# Altium PCB stm32G431_foc.pcbdoc (part 1 of 2)
Units mil, origin at the board's own origin, x right, y up, seen from the top; angles counter-clockwise.
Board outline 3189.03 x 2357.25 mil, 2 copper layers (Top Layer, Bottom Layer); 90 components, 81 nets, 390 pads, 421 vias.
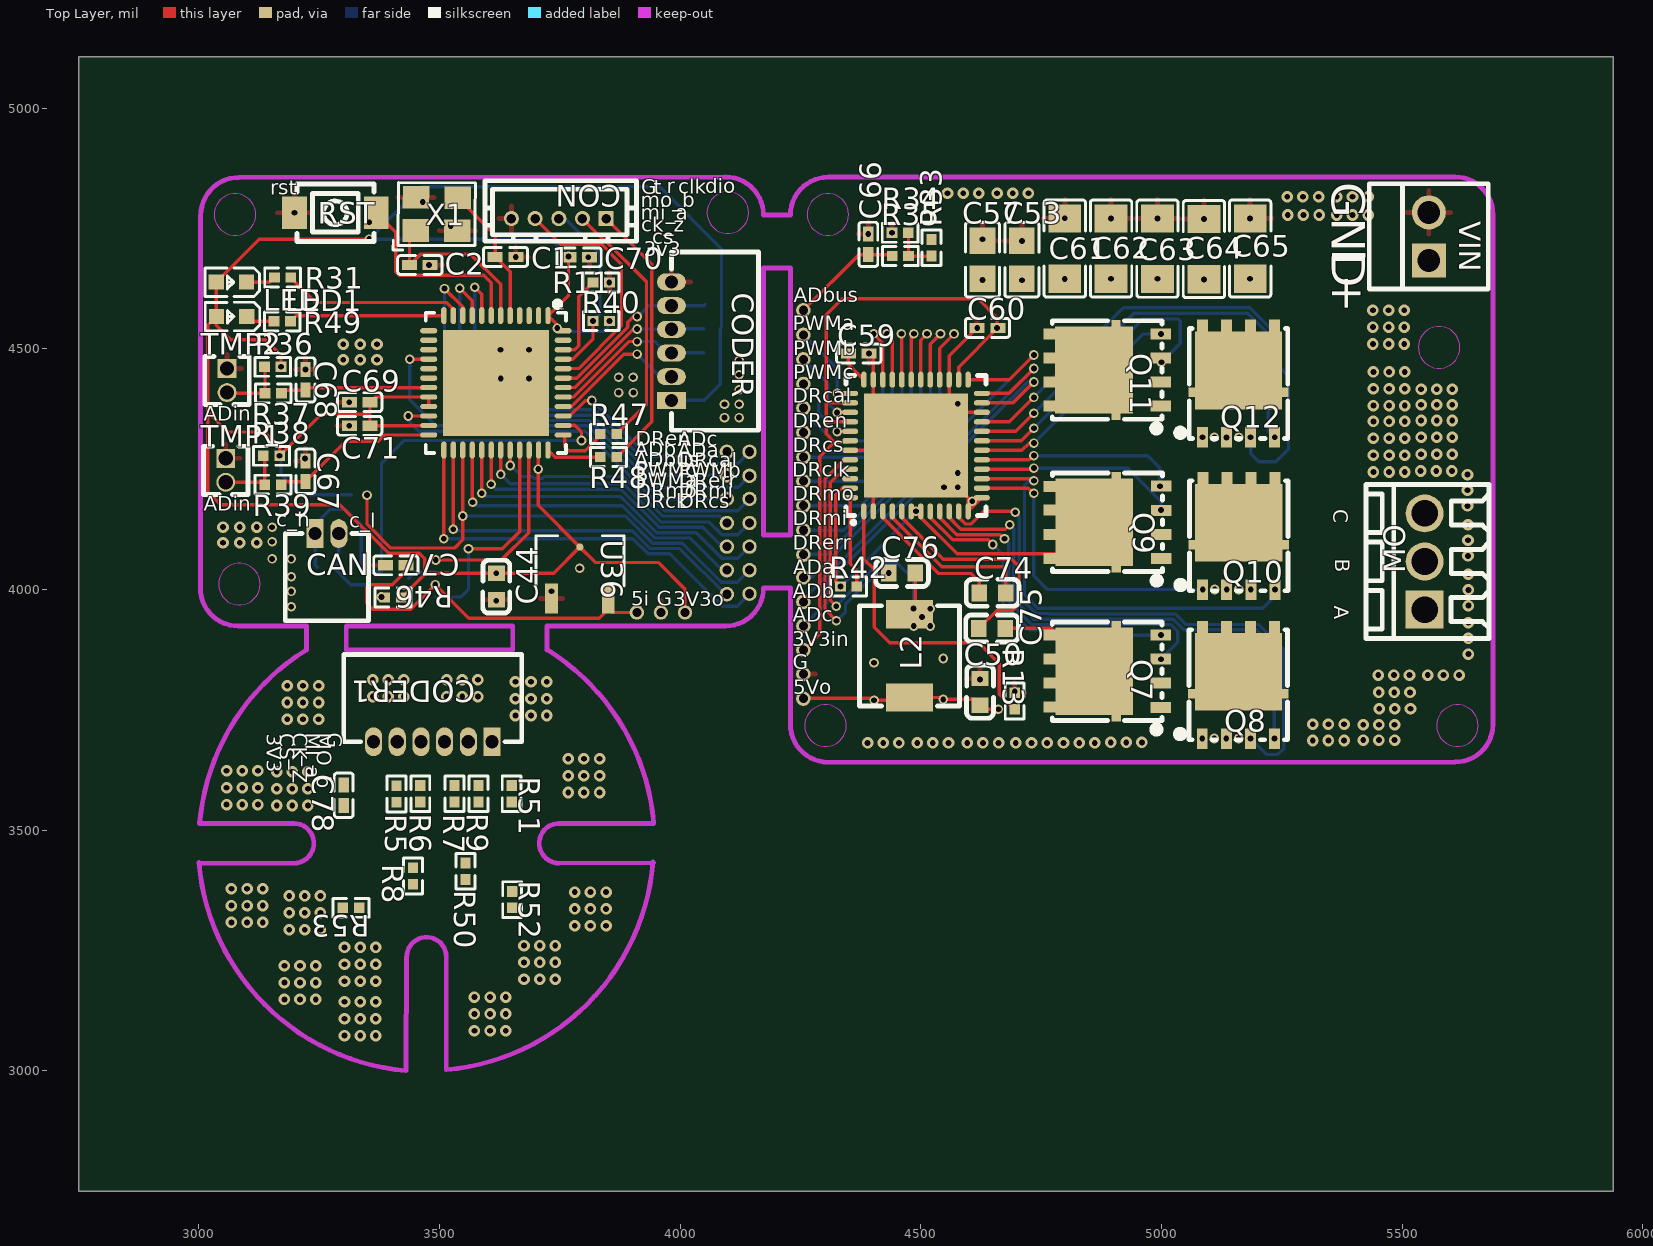
[diagram p0: Top Layer view]
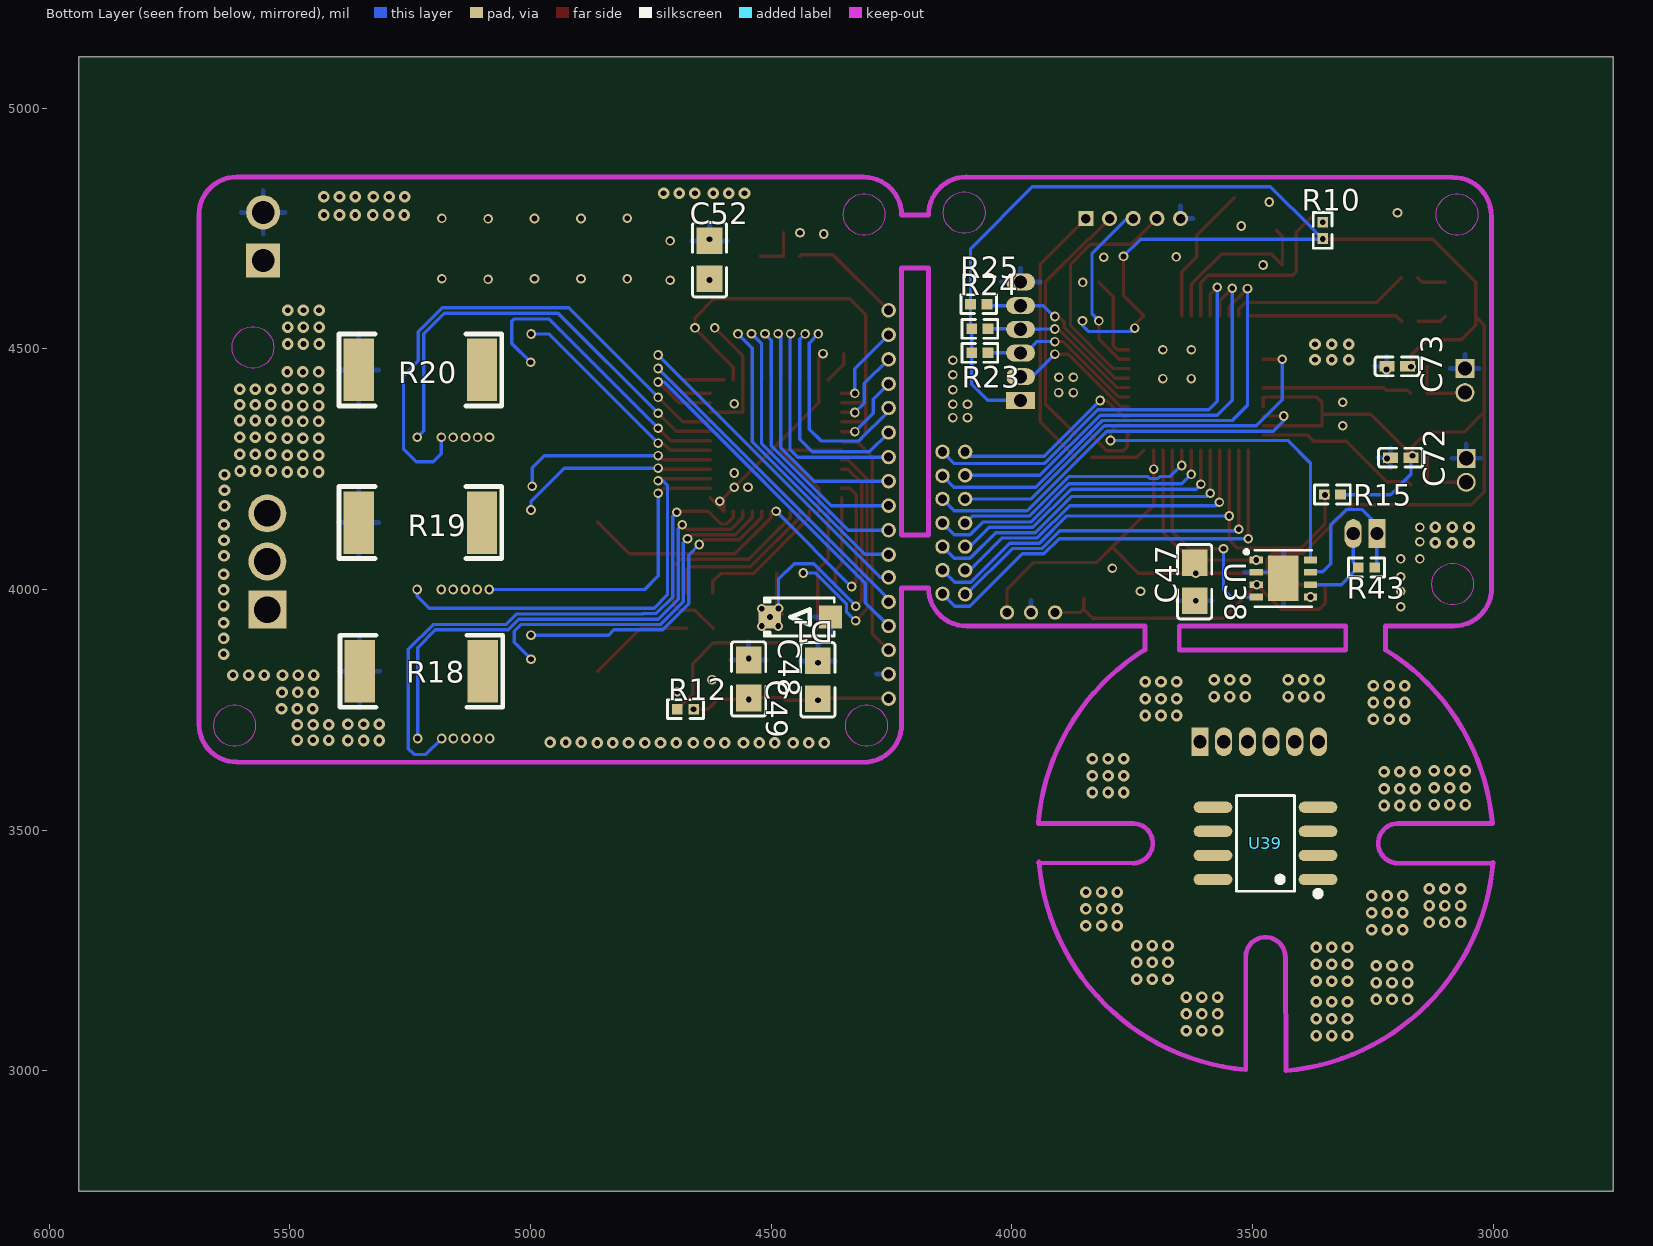
[diagram p1: Bottom Layer view, seen from below]

## Layer stack, top to bottom
Top Solder Mask Layer: solder mask 0.4, Solder Resist, Dk 3.5
Top Layer: signal copper 1.4
Dielectric1: dielectric 12.6, FR-4, Dk 4.8
Bottom Layer: signal copper 1.4
Bottom Solder Mask Layer: solder mask 0.4, Solder Resist, Dk 3.5

## Board outline
5939.03,2750 2750,2750 2750,5107.25 5939.03,5107.25

## Design rules (kind name [scope] priority, off if disabled: settings)
AssemblyTestPointUsage [All] p0: scope1count=1 scope1_0_kind=Board scope1_0_value=Board scope2count=1 scope2_0_kind=Board scope2_0_value=Board commentlength=0
AssemblyTestpoint [All] p0: scope1count=1 scope1_0_kind=Board scope1_0_value=Board scope2count=1 scope2_0_kind=Board scope2_0_value=Board commentlength=0
BoardOutlineClearance copperThickness1oz_1 [All] p0: scope1count=1 scope1_0_kind=Board scope1_0_value=Board scope2count=1 scope2_0_kind=Board scope2_0_value=Board commentlength=0 gap=10
BoardOutlineClearance copperThickness2oz_1 [All] p0: scope1count=1 scope1_0_kind=Board scope1_0_value=Board scope2count=1 scope2_0_kind=Board scope2_0_value=Board commentlength=0 gap=10
BoardOutlineClearance copperThickness1oz_1 [All] p1: gap=10 ignorepadtopadclearanceinfootprint=FALSE except(0: Arc-SplitContinuation Track-SplitContinuation SMDPad-SplitContinuation THPad-SplitContinuation Via-SplitContinuation Fill-SplitContinuation Poly-SplitContinuation Region-SplitContinuation Text-SplitContinuation; 6: Track-CutoutEdge SMDPad-CutoutEdge THPad-CutoutEdge Via-CutoutEdge Region-CutoutEdge; 11.8: Track-OutlineEdge SMDPad-OutlineEdge THPad-OutlineEdge Via-OutlineEdge Fill-OutlineEdge Fill-CutoutEdge Poly-OutlineEdge Region-OutlineEdge Text-OutlineEdge)
BoardOutlineClearance copperThickness2oz_1 [All] p2: gap=10 ignorepadtopadclearanceinfootprint=FALSE except(0: Arc-SplitContinuation Track-SplitContinuation SMDPad-SplitContinuation THPad-SplitContinuation Via-SplitContinuation Fill-SplitContinuation Poly-SplitContinuation Region-SplitContinuation Text-SplitContinuation; 6: Track-CutoutEdge SMDPad-CutoutEdge THPad-CutoutEdge Via-CutoutEdge Region-CutoutEdge; 11.8: Track-OutlineEdge SMDPad-OutlineEdge THPad-OutlineEdge Via-OutlineEdge Fill-OutlineEdge Fill-CutoutEdge Poly-OutlineEdge Region-OutlineEdge Text-OutlineEdge)
Clearance copperThickness1oz [All] p0 off: scope1count=1 scope1_0_kind=Board scope1_0_value=Board scope2count=1 scope2_0_kind=Board scope2_0_value=Board commentlength=1553 gap=6 // Protel DXP Scope 1 Expression Was: (InNet('GND') OR InNet('$1N9135') OR InNet('$1N9138') OR InNet('$1N1833') OR InNet('$1N1842') OR InNet('3V3') OR InNet('+5V') OR InNet('VM') OR InNet('$1N7928') OR InNet('VM_AD') OR InNet('TEMP1_AD') OR InNet('TEMP2_AD') OR InNet('$1N9649') OR InNet('$1N7809') OR InNet('$1N7874') OR InNet('SW') OR InNet('$1N9730') OR InNet('$1N32865') OR InNet('SPI1_CS') OR InNet('SPI1_SCLK_Z') OR InNet('SPI1_MISO_A') OR InNet('SPI1_MOSI_B') OR InNet('$1N22747') OR InNet('$1N21393') OR InNet('DBUG_RX') OR InNet('DBUG_TX') OR InNet('$1N7742') OR InNet('SHC') OR InNet('SHB') OR InNet('SHA') OR InNet('GHA') OR InNet('SPA') OR InNet('GLA') OR InNet('GHB') OR InNet('SPB') OR InNet('GLB') OR InNet('GHC') OR InNet('SPC') OR InNet('GLC') OR InNet('$1N2059') OR InNet('$1N2202') OR InNet('FB') OR InNet('DRV_MISO') OR InNet('$1N8829') OR InNet('$1N22797') OR InNet('$1N35691') OR InNet('$1N35795') OR InNet('$1N35883') OR InNet('SWCLK') OR InNet('SWDIO') OR InNet('SOC') OR InNet('SOB') OR InNet('SOA') OR InNet('DRV_CAL') OR InNet('DRV_CS') OR InNet('DRV_SCLK') OR InNet('DRV_MOSI') OR InNet('DRV_FAULT') OR InNet('INHA') OR InNet('INHB') OR InNet('INHC') OR InNet('CAN_RX') OR InNet('CAN_TX') OR InNet('CAN_STB') OR InNet('DRV_EN') OR InNet('LED_1') OR InNet('LED_2') OR InNet('$1N46251') OR InNet('$1N47947') OR InNet('VCC') OR InNet('$1N50187') OR InNet('$1N50186') OR InNet('$1N50185') OR InNet('$1N50184') OR InNet('CSQ') OR InNet('SCK') OR InNet('$1N50188') OR InNet('IFC') OR InNet('IFA') OR InNet('IFB') OR InNet('DATA'))
Clearance copperThickness2oz [All] p0: scope1count=1 scope1_0_kind=Board scope1_0_value=Board scope2count=1 scope2_0_kind=Board scope2_0_value=Board commentlength=0 gap=6
Clearance copperThickness1oz [(InNet('GND') OR InNet('$1N9135') OR InNet('$1N9138') OR InNet('$1N1833') OR InNet('$1N1842') OR InNet('3V3') OR InNet('+5V') OR InNet('VM') OR InNet('$1N7928') OR InNet('VM_AD') OR InNet('TEMP1_AD') OR InNet('TEMP2_AD') OR InNet('$1N9649') OR InNet('$1N7809') OR InNet('$1N7874') OR InNet('SW') OR InNet('$1N9730') OR InNet('$1N32865') OR InNet('SPI1_CS') OR InNet('SPI1_SCLK_Z') OR InNet('SPI1_MISO_A') OR InNet('SPI1_MOSI_B') OR InNet('$1N22747') OR InNet('$1N21393') OR InNet('DBUG_RX') OR InNet('DBUG_TX') OR InNet('$1N7742') OR InNet('SHC') OR InNet('SHB') OR InNet('SHA') OR InNet('GHA') OR InNet('SPA') OR InNet('GLA') OR InNet('GHB') OR InNet('SPB') OR InNet('GLB') OR InNet('GHC') OR InNet('SPC') OR InNet('GLC') OR InNet('$1N2059') OR InNet('$1N2202') OR InNet('FB') OR InNet('DRV_MISO') OR InNet('$1N8829') OR InNet('$1N22797') OR InNet('$1N35691') OR InNet('$1N35795') OR InNet('$1N35883') OR InNet('SWCLK') OR InNet('SWDIO') OR InNet('SOC') OR InNet('SOB') OR InNet('SOA') OR InNet('DRV_CAL') OR InNet('DRV_CS') OR InNet('DRV_SCLK') OR InNet('DRV_MOSI') OR InNet('DRV_FAULT') OR InNet('INHA') OR InNet('INHB') OR InNet('INHC') OR InNet('CAN_RX') OR InNet('CAN_TX') OR InNet('CAN_STB') OR InNet('DRV_EN') OR InNet('LED_1') OR InNet('LED_2') OR InNet('$1N46251') OR InNet('$1N47947') OR InNet('VCC') OR InNet('$1N50187') OR InNet('$1N50186') OR InNet('$1N50185') OR InNet('$1N50184') OR InNet('CSQ') OR InNet('SCK') OR InNet('$1N50188') OR InNet('IFC') OR InNet('IFA') OR InNet('IFB') OR InNet('DATA'))] p1: gap=6 ignorepadtopadclearanceinfootprint=FALSE except(4: Track-Track; 6.9: Track-Hole SMDPad-Hole THPad-Hole Via-Hole Fill-Hole Poly-Hole Region-Hole Text-Hole; 7: Arc-Arc Arc-Track Arc-SMDPad Arc-THPad Arc-Via Arc-Fill Arc-Poly Arc-Region Arc-Text Arc-Hole; 11.8: Track-Fill Fill-Region)
Clearance copperThickness2oz [All] p2: gap=6 ignorepadtopadclearanceinfootprint=FALSE except(6.9: Track-Hole SMDPad-Hole THPad-Hole Via-Hole Fill-Hole Poly-Hole Region-Hole Text-Hole; 7: Arc-Arc Arc-Track Arc-SMDPad Arc-THPad Arc-Via Arc-Fill Arc-Poly Arc-Region Arc-Text Arc-Hole; 8: Track-Track; 11.8: Track-Fill Fill-Region)
ComponentClearance [All] p0: scope1count=1 scope1_0_kind=Board scope1_0_value=Board scope2count=1 scope2_0_kind=Board scope2_0_value=Board commentlength=0 gap=10 collisioncheckmode=3
DiffPairsRouting differentialPair [All] p0: scope1count=1 scope1_0_kind=Board scope1_0_value=Board scope2count=1 scope2_0_kind=Board scope2_0_value=Board commentlength=0
DiffPairsRouting differentialPair [All] p1: maxlimit=6 minlimit=6 mostfreqgap=6 toplayer_minwidth=5 toplayer_maxwidth=100 toplayer_prefwidth=10 bottomlayer_minwidth=5 bottomlayer_maxwidth=100 bottomlayer_prefwidth=10 maxuncoupledlength=10
FabricationTestPointUsage [All] p0: scope1count=1 scope1_0_kind=Board scope1_0_value=Board scope2count=1 scope2_0_kind=Board scope2_0_value=Board commentlength=0 valid=0 allowmultiple=FALSE
FabricationTestpoint [All] p0: scope1count=1 scope1_0_kind=Board scope1_0_value=Board scope2count=1 scope2_0_kind=Board scope2_0_value=Board commentlength=0 side=3 testpointundercomponent=TRUE minsize=40 maxsize=100 preferedsize=60 minholesize=0 maxholesize=40 preferedholesize=32 testpointgrid=1
FanoutControl Fanout_BGA [All] p0 off: scope1count=1 scope1_0_kind=Board scope1_0_value=Board scope2count=1 scope2_0_kind=Board scope2_0_value=Board commentlength=69 // Protel DXP Scope 1 Expression Was: IsBGA   Fanout_BGA (Default Rule)
FanoutControl Fanout_LCC [All] p0 off: scope1count=1 scope1_0_kind=Board scope1_0_value=Board scope2count=1 scope2_0_kind=Board scope2_0_value=Board commentlength=69 // Protel DXP Scope 1 Expression Was: IsLCC   Fanout_LCC (Default Rule)
FanoutControl Fanout_SOIC [All] p0 off: scope1count=1 scope1_0_kind=Board scope1_0_value=Board scope2count=1 scope2_0_kind=Board scope2_0_value=Board commentlength=71 // Protel DXP Scope 1 Expression Was: IsSOIC   Fanout_SOIC (Default Rule)
FanoutControl Fanout_Small [All] p0 off: scope1count=1 scope1_0_kind=Board scope1_0_value=Board scope2count=1 scope2_0_kind=Board scope2_0_value=Board commentlength=84 // Protel DXP Scope 1 Expression Was: (CompPinCount < 5)   Fanout_Small (Default Rule)
FanoutControl Fanout_Default [All] p0: scope1count=1 scope1_0_kind=Board scope1_0_value=Board scope2count=1 scope2_0_kind=Board scope2_0_value=Board commentlength=30 // Fanout_Default (Default Rule)
Height [All] p0: scope1count=1 scope1_0_kind=Board scope1_0_value=Board scope2count=1 scope2_0_kind=Board scope2_0_value=Board commentlength=0
HoleSize [All] p0: scope1count=1 scope1_0_kind=Board scope1_0_value=Board scope2count=1 scope2_0_kind=Board scope2_0_value=Board commentlength=0 absolutevalues=TRUE maxlimit=100 minlimit=1 maxpercent=80.000 minpercent=20.000
HoleToHoleClearance [All] p0: scope1count=1 scope1_0_kind=Board scope1_0_value=Board scope2count=1 scope2_0_kind=Board scope2_0_value=Board commentlength=0
LayerPairs [All] p0: scope1count=1 scope1_0_kind=Board scope1_0_value=Board scope2count=1 scope2_0_kind=Board scope2_0_value=Board commentlength=0 enforce=TRUE
MinimumSolderMaskSliver [All] p0: scope1count=1 scope1_0_kind=Board scope1_0_value=Board scope2count=1 scope2_0_kind=Board scope2_0_value=Board commentlength=0
NetAntennae [All] p0: scope1count=1 scope1_0_kind=Board scope1_0_value=Board scope2count=1 scope2_0_kind=Board scope2_0_value=Board commentlength=0
PasteMaskExpansion pasteMaskExpansion [All] p0: scope1count=1 scope1_0_kind=Board scope1_0_value=Board scope2count=1 scope2_0_kind=Board scope2_0_value=Board commentlength=0 expansion=0
PasteMaskExpansion pasteMaskExpansion [All] p1: expansion=0
PlaneClearance [All] p0: scope1count=1 scope1_0_kind=Board scope1_0_value=Board scope2count=1 scope2_0_kind=Board scope2_0_value=Board commentlength=0 clearance=20
PlaneConnect innerPlane [All] p0: scope1count=1 scope1_0_kind=Board scope1_0_value=Board scope2count=1 scope2_0_kind=Board scope2_0_value=Board commentlength=0 planeconnectstyle=Relief reliefexpansion=20 reliefentries=4 reliefconductorwidth=10 reliefairgap=10
PlaneConnect innerPlane [All] p1: planeconnectstyle=Relief reliefexpansion=20 reliefentries=4 reliefconductorwidth=10 reliefairgap=10
PolygonConnect copperRegion [All] p0: scope1count=1 scope1_0_kind=Board scope1_0_value=Board scope2count=1 scope2_0_kind=Board scope2_0_value=Board commentlength=0 connectstyle=Relief reliefconductorwidth=10 reliefentries=4 polygonreliefangle="90 Angle"
PolygonConnect copperRegion [All] p1: connectstyle=Relief reliefconductorwidth=10 reliefentries=4 polygonreliefangle="90 Angle" airgapwidth=10
RoutingCorners [All] p0: scope1count=1 scope1_0_kind=Board scope1_0_value=Board scope2count=1 scope2_0_kind=Board scope2_0_value=Board commentlength=0 cornerstyle=45-Degree minsetback=100 maxsetback=100
RoutingLayers [All] p0: scope1count=1 scope1_0_kind=Board scope1_0_value=Board scope2count=1 scope2_0_kind=Board scope2_0_value=Board commentlength=0 top layer=Automatic bottom layer=Automatic
RoutingPriority [All] p0: scope1count=1 scope1_0_kind=Board scope1_0_value=Board scope2count=1 scope2_0_kind=Board scope2_0_value=Board commentlength=0
RoutingTopology [All] p0: scope1count=1 scope1_0_kind=Board scope1_0_value=Board scope2count=1 scope2_0_kind=Board scope2_0_value=Board commentlength=0 topology=Shortest
RoutingVias viaSize [All] p0: scope1count=1 scope1_0_kind=Board scope1_0_value=Board scope2count=1 scope2_0_kind=Board scope2_0_value=Board commentlength=0 holewidth=12.01 width=24.02 viastyle="Through Hole" minholewidth=11.81 minwidth=19.68 maxholewidth=248.03 maxwidth=393.7
RoutingVias viaSize [All] p1: holewidth=12.01 width=24.02 viastyle="Through Hole" minholewidth=11.81 minwidth=19.68 maxholewidth=248.03 maxwidth=393.7
ShortCircuit [All] p0: scope1count=1 scope1_0_kind=Board scope1_0_value=Board scope2count=1 scope2_0_kind=Board scope2_0_value=Board commentlength=0 allowed=FALSE
SilkToBoardRegionClearance [All] p0: scope1count=1 scope1_0_kind=Board scope1_0_value=Board scope2count=1 scope2_0_kind=Board scope2_0_value=Board commentlength=0
SilkToSilkClearance [All] p0: scope1count=1 scope1_0_kind=Board scope1_0_value=Board scope2count=1 scope2_0_kind=Board scope2_0_value=Board commentlength=0
SilkToSolderMaskClearance [All] p0 off: scope1count=1 scope1_0_kind=Board scope1_0_value=Board scope2count=1 scope2_0_kind=Board scope2_0_value=Board commentlength=44 // Protel DXP Scope 1 Expression Was: IsPad
SolderMaskExpansion solderMaskExpansion [All] p0: scope1count=1 scope1_0_kind=Board scope1_0_value=Board scope2count=1 scope2_0_kind=Board scope2_0_value=Board commentlength=0 expansion=2
SolderMaskExpansion solderMaskExpansion [All] p1: expansion=2 istentingtop=FALSE useseparateexpansions=TRUE expansionbottom=2 istentingbottom=FALSE
UnRoutedNet [All] p0: scope1count=1 scope1_0_kind=Board scope1_0_value=Board scope2count=1 scope2_0_kind=Board scope2_0_value=Board commentlength=0
UnpouredPolygon [All] p0: scope1count=1 scope1_0_kind=Board scope1_0_value=Board scope2count=1 scope2_0_kind=Board scope2_0_value=Board commentlength=0
Width copperThickness1oz_2 [All] p0: scope1count=1 scope1_0_kind=Board scope1_0_value=Board scope2count=1 scope2_0_kind=Board scope2_0_value=Board commentlength=0 maxlimit=100 minlimit=5 preferedwidth=10
Width copperThickness2oz_2 [All] p0: scope1count=1 scope1_0_kind=Board scope1_0_value=Board scope2count=1 scope2_0_kind=Board scope2_0_value=Board commentlength=0 maxlimit=100 minlimit=8 preferedwidth=10
Width copperThickness1oz_2 [All] p1: maxlimit=100 minlimit=5 preferedwidth=10
Width copperThickness2oz_2 [All] p2: maxlimit=100 minlimit=8 preferedwidth=10
27 further rules are at their usual default settings.

## Components (designator, comment, footprint, x,y, rotation, side; value= is the part's Value field where it differs from the comment)
C1 "CAP_0402" C0402 3636.97,4691.18 r180 top
C2 "CAP_0402" C0402 3458.97,4674.18 r180 top
C44 "0.1u" C0603 3617.97,4006.18 r90 top
C47 "CAP_0805" C0805 3619.97,4016.18 r90 bottom
C48 "CAP_0805" C0805 4402.9,3812.31 r270 bottom
C49 "CAP_0805" C0805 4546.81,3814.12 r270 bottom
C50 "0.1u" C0603 4622.97,3787.18 r270 top
C52 "CAP_0805" C0805 4628.1,4685.05 r270 bottom
C53 "CAP_0805" C0805 4710.1,4685.05 r270 top
C57 "CAP_0805" C0805 4628.1,4685.31 r270 top
C59 "CAP_0402" C0402 4370.97,4490.18 r0 top
C60 "CAP_0402" C0402 4638.51,4543.64 r0 top
C61 "CAP_1206" C1206 4799.26,4708.41 r270 top
C62 "CAP_1206" C1206 4895.26,4708.41 r270 top
C63 "CAP_1206" C1206 4991.75,4708.24 r270 top
C64 "CAP_1206" C1206 5088.26,4707.41 r270 top
C65 "CAP_1206" C1206 5184.26,4708.41 r270 top
C66 "CAP_0402" C0402 4390.97,4717.18 r270 top
C67 "CAP_0402" C0402 3221.15,4245.64 r270 top
C68 "CAP_0402" C0402 3221.51,4435.61 r270 top
C69 "CAP_0402" C0402 3333.97,4389.18 r0 top
C70 "CAP_0402" C0402 3789.97,4690.18 r180 top
C71 "CAP_0402" C0402 3333.97,4340.18 r0 top
C72 "CAP_0402" C0402 3191.93,4273.87 r180 bottom
C73 "CAP_0402" C0402 3199.22,4463.87 r180 bottom
C74 "CAP_0603" C0603 4648.97,3993.18 r180 top
C75 "CAP_0603" C0603 4647.97,3919.18 r180 top
C76 "CAP_0603" C0603 4460.97,4034.18 r0 top
C77 "CAP_0402" C0402 3409.19,4050.26 r0 top
C78 "CAP_0402" C0402 3300.86,3572.55 r90 top
CAN "BX-MX1.25-2PWZ" CONN-TH_2P-P1.25_BX-MX1.25-2PWZ 3265.97,4116.18 r0 top
CODER "BX-MX1.25-6PWZ" CONN-TH_6P-P1.25_BX-MX1.25-6PWZ 3981.78,4515.99 r90 top
CODER1 "BX-MX1.25-6PWZ" CONN-TH_6P-P1.25_BX-MX1.25-6PWZ 3485.86,3683.55 r180 top
CON "ZX-MX1.25-5PZZ" CONN-TH_5P-P1.25_L3.2-W8.0 3747.69,4770.82 r180 top
D1 "SS14_C2909920" SOD-123FL_L2.8-W1.8-LS3.7-RD 4439.7,3942.68 r180 bottom
L2 "15uH" IND-SMD_L5.4-W5.2_YXMAA0503 4476.48,3862.13 r270 top
LED "LED_0603-R" LED_0603 3065.45,4638.43 r180 top
LED1 "LED_0603-R" LED_0603 3065.79,4567.07 r180 top
MO "DB125-2.54-3P-GN-S" CONN-TH_DB125-2.54-3P-GN 5546.97,4058.18 r90 top
Q7 "LNN06R140" DFN-8_L4.9-W6.0-P1.27-LS6.1-BL 4887.4,3830.23 r90 top
Q8 "LNN06R140" DFN-8_L4.9-W6.0-P1.27-LS6.1-BL 5159.77,3801.87 r0 top
Q9 "LNN06R140" DFN-8_L4.9-W6.0-P1.27-LS6.1-BL 4888.04,4139.6 r90 top
Q10 "LNN06R140" DFN-8_L4.9-W6.0-P1.27-LS6.1-BL 5160.68,4111.52 r0 top
Q11 "LNN06R140" DFN-8_L4.9-W6.0-P1.27-LS6.1-BL 4887.27,4455.99 r90 top
Q12 "LNN06R140" DFN-8_L4.9-W6.0-P1.27-LS6.1-BL 5160.28,4427.75 r0 top
R5 "Res_0402" R0402 3410.39,3575.08 r270 top
R6 "Res_0402" R0402 3459.86,3575.55 r270 top
R7 "Res_0402" R0402 3530.86,3575.55 r270 top
R8 "Res_0402" R0402 3444.86,3404.55 r270 top
R9 "Res_0402" R0402 3580.86,3575.55 r270 top
R10 "Res_0402" R0402 3353.97,4746.18 r90 bottom
R11 "Res_0402" R0402 3835.97,4638.18 r0 top
R12 "Res_0402" R0402 4677.97,3751.18 r180 bottom
R13 "Res_0402" R0402 4694.97,3768.18 r270 top
R15 "Res_0402" R0402 3333.97,4197.18 r180 bottom
R18 "15m" R2512 5226.97,3830.18 r0 bottom
R19 "15m" R2512 5228.97,4139.18 r0 bottom
R20 "15m" R2512 5228.97,4456.18 r0 bottom
R23 "Res_0402" R0402 4066.31,4491.81 r180 bottom
R24 "Res_0402" R0402 4066.31,4541.81 r180 bottom
R25 "Res_0402" R0402 4068.69,4592.79 r180 bottom
R31 "1k" R0402 3173.97,4648.18 r180 top
R33 "Res_0402" R0402 4521.97,4710.18 r90 top
R34 "Res_0402" R0402 4457.07,4741.12 r0 top
R35 "Res_0402" R0402 4457.45,4692.86 r180 top
R36 "Res_0402" R0402 3153.43,4462.7 r0 top
R37 "Res_0402" R0402 3154.38,4407.76 r180 top
R38 "Res_0402" R0402 3150.82,4277.7 r0 top
R39 "Res_0402" R0402 3153.69,4217.76 r180 top
R40 "Res_0402" R0402 3835.97,4558.18 r180 top
R42 "Res_0402" R0402 4349.97,4006.18 r180 top
R43 "Res_0402" R0402 3262.83,4045.77 r180 bottom
R46 "Res_0402" R0402 3403.19,3983.26 r0 top
R47 "Res_0402" R0402 3850.97,4323.18 r0 top
R48 "Res_0402" R0402 3850.97,4275.18 r0 top
R49 "1k" R0402 3172.97,4557.18 r180 top
R50 "Res_0402" R0402 3553.86,3414.55 r270 top
R51 "Res_0402" R0402 3649.86,3575.55 r270 top
R52 "Res_0402" R0402 3650.86,3355.55 r270 top
R53 "Res_0402" R0402 3315.86,3338.55 r180 top
RST "KEY_3x4X2_SMT" KEY-SMD_L4.0-W3.0-LS4.9-1 3283.44,4782.81 r0 top
TMP1 "PZ127V-11-02-H25" HDR-TH_2P-P1.27-V-M 3055.67,4247.65 r270 top
TMP2 "PZ127V-11-02-H25" HDR-TH_2P-P1.27-V-M 3058.39,4434.18 r270 top
U1 "STM32G431CBU6U" UFQFPN-48_L7.0-W7.0-P0.50-BL-EP5.6 3617.14,4429.42 r180 top
U2 "DRV8323RSRGZT" VQFN-48_L7.0-W7.0-P0.50-BL-EP5.5 4489.97,4299.18 r0 top
U36 "AMS1117-5.0(XBLW)" SOT-89-3_L4.5-W2.5-P1.50-LS4.2-BR 3791.55,4034.95 r270 top
U38 "SIT1042TK/3" HVSON-8_L3.0-W3.0-P0.65-BL-EP 3435.74,4022.94 r270 bottom
U39 "TLE5012BE1000FUMA1" SOIC-8_L4.9-W3.9-P1.27-LS6.0-BL 3472.86,3472.55 r90 bottom
VIN "DB125-2.54-2P-GN-S" CONN-TH_DB125-2.54-2P-GN 5555.59,4733.57 r90 top
X1 "16MHz" OSC-SMD_4P-L3.2-W2.5-BL 3493.97,4780.18 r359.62 top

## Footprints (in the part's own frame and the unit in brackets; to place one, negate y for a bottom-side part, rotate by r counter-clockwise, add the part's x,y. Pads: shape width x height; smd on the part's side, far side on the other; paste and mask are expansions set on the pad)
C0402 [mm]
  rect 0.79x0.54 smd paste-100 mask+0: 1(-0.545,0) 2(0.545,0)
  silkscreen extent -1.17,-0.5 1.17,0.5
C0603 [mm]
  rect 0.8x0.9 smd: 1(-0.7,0) 2(0.7,0)
  silkscreen extent -1.41,-0.71 1.39,0.72
C0805 [mm]
  rect 1.41x1.35 smd paste-100 mask+0: 1(-1,0) 2(1,0)
  silkscreen extent -1.96,-0.9 1.96,0.9
C1206 [mm]
  rect 1.485x1.728 smd paste-100 mask+0: 1(-1.593,0) 2(1.593,0)
  silkscreen extent -2.56,-1.09 2.56,1.09
CONN-TH_2P-P1.25_BX-MX1.25-2PWZ [mil]
  rect 35.43x60 hole 27.56: 1(-24.6,0)
  oval 35.43x60 hole 27.56: 2(24.61,0)
  silkscreen extent -87,-181 87,0
CONN-TH_5P-P1.25_L3.2-W8.0 [mm]
  rect 0.8x0.8 hole 0.5: 1(-2.5,0)
  round 0.8 hole 0.5: 2(-1.25,0) 3(0,0)
  round 0.8 hole 0.5 copper offset 0,0: 4(1.25,0) 5(2.5,0)
  silkscreen extent -4.1,-2 3.9,1.2
CONN-TH_6P-P1.25_BX-MX1.25-6PWZ [mil]
  rect 35.43x60 hole 27.56: 1(-123.03,0)
  oval 35.43x60 hole 27.56: 2(-73.82,0) 3(-24.6,0) 4(24.61,0) 5(73.82,0) 6(123.03,0)
  silkscreen extent -185,-181 185,0
CONN-TH_DB125-2.54-2P-GN [mm]
  rect 1.8x1.8 hole 1.2: 1(-1.27,0)
  round 1.8 hole 1.2: 2(1.27,0)
  silkscreen extent -2.78,-3.14 2.78,3.14
CONN-TH_DB125-2.54-3P-GN [mm]
  rect 2x2 hole 1.4: 1(-2.54,0)
  round 2 hole 1.4: 2(0,0) 3(2.54,0)
  silkscreen extent -4.06,-3.4 4.06,3.1
DFN-8_L4.9-W6.0-P1.27-LS6.1-BL [mm]
  rect 0.58x1.079 smd paste-100 mask+0: 1(-1.905,-2.835) 2(-0.635,-2.835) 3(0.635,-2.835) 4(1.905,-2.835)
  rect 0.58x1.08 smd paste-100 mask+0: 5(1.9,2.835) 6(0.64,2.835) 7(-0.63,2.835) 8(-1.9,2.835)
  rect 0.95x0.5 smd paste-100 mask+0: 9(-2.169,-0.465) 9(2.169,-0.465)
  rect 4.6x4.1 smd paste-100 mask+0: 9(0,0.695)
  silkscreen extent -3.2,-2.89 2.6,2.9
HDR-TH_2P-P1.27-V-M [mm]
  rect 1x1 hole 0.75: 1(-0.635,0)
  round 1 hole 0.75: 2(0.635,0)
  silkscreen extent -1.27,-1.18 1.27,1.18
HVSON-8_L3.0-W3.0-P0.65-BL-EP [mil]
  rect 14x28 smd: 1(-38.39,-56.4) 2(-12.79,-56.4) 3(12.8,-56.4) 4(38.39,-56.4) 5(38.39,56.4) 6(12.8,56.4) 7(-12.79,56.4) 8(-38.39,56.4)
  rect 94.49x62.99 smd: 9(0,0)
  silkscreen extent -59,-81 59,59
IND-SMD_L5.4-W5.2_YXMAA0503 [mm]
  rect 1.5x2.5 smd: 1(-2.2,0) 2(2.2,0)
  silkscreen extent -2.64,-2.64 2.64,2.64
KEY-SMD_L4.0-W3.0-LS4.9-1 [mm]
  rect 1.3x1.7 smd paste+0 mask+0: 1(-2.159,0) 2(2.159,0)
  silkscreen extent -2.03,-1.52 2.03,1.52
LED_0603 [mil]
  rect 31.5x31.5 smd paste+0 mask+0: 1(-33.5,-0.4) 2(29.5,-0.2)
  silkscreen extent -61,-30 53,30
OSC-SMD_4P-L3.2-W2.5-BL [mm]
  rect 1.4x1.2 smd: 1(-1.1,-0.875) 2(1.1,-0.875) 3(1.1,0.875) 4(-1.1,0.875)
  silkscreen extent -2.29,-1.9 2.03,1.65
R0402 [mm]
  rect 0.566x0.54 smd paste-100 mask+0: 1(-0.433,0) 2(0.433,0)
  silkscreen extent -0.94,-0.5 0.94,0.5
R2512 [mm]
  rect 1.6x3.3 smd paste+0 mask+0: 1(-3.25,0) 2(3.25,0)
  silkscreen extent -4.3,-1.9 4.3,1.9
SOD-123FL_L2.8-W1.8-LS3.7-RD [mm]
  rect 1.2x1.2 smd: 1(-1.6,0) 2(1.6,0)
  silkscreen extent -1.9,-1 1.8,1
SOIC-8_L4.9-W3.9-P1.27-LS6.0-BL [mm]
  oval 0.588x2.045 smd: 1(-1.905,-2.772) 2(-0.635,-2.772) 3(0.635,-2.772) 4(1.905,-2.772) 5(1.905,2.772) 6(0.635,2.772) 7(-0.635,2.772) 8(-1.905,2.772)
  silkscreen extent -2.8,-2.92 2.53,1.52
SOT-89-3_L4.5-W2.5-P1.50-LS4.2-BR [mm]
  rect 1.575x0.672 smd: 1(1.356,-1.5) 3(1.356,1.5)
  round 0.38 smd: 2(-1.356,0)
  silkscreen extent -1.95,-2.33 0.7,2.33
UFQFPN-48_L7.0-W7.0-P0.50-BL-EP5.6 [mm]
  oval 0.28x0.9 smd paste-100 mask+0: 1(-2.751,-3.547) 2(-2.25,-3.547) 3(-1.75,-3.547) 4(-1.25,-3.547) 5(-0.749,-3.547) 6(-0.249,-3.547) 7(0.249,-3.547) 8(0.749,-3.547) 9(1.25,-3.547) 10(1.75,-3.547) 11(2.25,-3.547) 12(2.751,-3.547) 25(2.751,3.547) 26(2.25,3.547) 27(1.75,3.547) 28(1.25,3.547) 29(0.749,3.547) 30(0.249,3.547) 31(-0.249,3.547) 32(-0.749,3.547) 33(-1.25,3.547) 34(-1.75,3.547) 35(-2.25,3.547) 36(-2.751,3.547)
  oval 0.9x0.28 smd paste-100 mask+0: 13(3.547,-2.75) 14(3.547,-2.25) 15(3.547,-1.75) 16(3.547,-1.25) 17(3.547,-0.75) 18(3.547,-0.25) 19(3.547,0.25) 20(3.547,0.75) 21(3.547,1.25) 22(3.547,1.75) 23(3.547,2.25) 24(3.547,2.75) 37(-3.547,2.751) 38(-3.547,2.25) 39(-3.547,1.75) 40(-3.547,1.25) 41(-3.547,0.749) 42(-3.547,0.249) 43(-3.547,-0.249) 44(-3.547,-0.749) 45(-3.547,-1.25) 46(-3.547,-1.75) 47(-3.547,-2.25) 48(-3.547,-2.751)
  rect 5.6x5.6 smd paste-100 mask+0: 49(0,0)
  silkscreen extent -3.7,-4.3 3.7,3.7
VQFN-48_L7.0-W7.0-P0.50-BL-EP5.5 [mm]
  oval 0.28x0.85 smd paste-100 mask+0: 1(-2.75,-3.475) 2(-2.25,-3.475) 3(-1.75,-3.475) 4(-1.25,-3.475) 5(-0.75,-3.475) 6(-0.25,-3.475) 7(0.25,-3.475) 8(0.75,-3.475) 9(1.25,-3.475) 10(1.75,-3.475) 11(2.25,-3.475) 12(2.75,-3.475) 25(2.75,3.475) 26(2.25,3.475) 27(1.75,3.475) 28(1.25,3.475) 29(0.75,3.475) 30(0.25,3.475) 31(-0.25,3.475) 32(-0.75,3.475) 33(-1.25,3.475) 34(-1.75,3.475) 35(-2.25,3.475) 36(-2.75,3.475)
  oval 0.85x0.28 smd paste-100 mask+0: 13(3.475,-2.75) 14(3.475,-2.25) 15(3.475,-1.75) 16(3.475,-1.25) 17(3.475,-0.75) 18(3.475,-0.25) 19(3.475,0.25) 20(3.475,0.75) 21(3.475,1.25) 22(3.475,1.75) 23(3.475,2.25) 24(3.475,2.75) 37(-3.475,2.75) 38(-3.475,2.25) 39(-3.475,1.75) 40(-3.475,1.25) 41(-3.475,0.75) 42(-3.475,0.25) 43(-3.475,-0.25) 44(-3.475,-0.75) 45(-3.475,-1.25) 46(-3.475,-1.75) 47(-3.475,-2.25) 48(-3.475,-2.75)
  rect 5.5x5.5 smd paste-100 mask+0: 49(0,0)
  silkscreen extent -3.7,-4.16 3.7,3.7

## Free pads (board coordinates)
  round 30 hole 19: 1(3909.97,3952.18) 1(3959.97,3952.18) 1(4009.97,3952.18) 1(4096.97,3990.18) 1(4096.97,4040.18) 1(4096.97,4089.18) 1(4096.97,4138.18) 1(4096.97,4188.18) 1(4096.97,4237.18) 1(4096.97,4286.18) 1(4143.97,3991.18) 1(4143.97,4040.18) 1(4143.97,4089.18) 1(4143.97,4138.18) 1(4143.97,4188.18) 1(4143.97,4236.18) 1(4143.97,4286.18) 1(4255.94,4072.38) 1(4255.97,3773.18) 1(4255.97,3824.18) 1(4255.97,3874.18) 1(4255.97,3924.18) 1(4255.97,3974.18) 1(4255.97,4025.18) 1(4255.97,4123.18) 1(4255.97,4174.18) 1(4255.97,4225.18) 1(4255.97,4275.18) 1(4255.97,4326.18) 1(4255.97,4377.18) 1(4255.97,4427.18) 1(4255.97,4478.18) 1(4255.97,4529.18) 1(4255.97,4580.18)

## Via types
v1: diameter 24.02, hole 12.01, Top Layer to Bottom Layer, 261 vias
v2: diameter 20, hole 12.01, Top Layer to Bottom Layer, 160 vias

## Nets (pads, with @x,y where several pads share a name; then routed paths per layer and width w, separated by ;. In a path a pad name is that pad's centre, name@x,y a point inside that pad or via, vN(x,y) a via of type N, cw(c..) or ccw(c..) an arc to the next point about the centre after c; other vN are vias at no path point)
3V3: C44.2 C47.2 C60.2 C69.2 C70.2 C71.2 C72.2 C73.2 CODER.1 LED1.2 LED.2 pad.1@4009.97,3952.18 pad.1@4255.97,3874.18 R10.1 R15.2 R23.1 R24.1 R25.1 R36.2 R38.2 R40.1 R46.2 U1.1 U1.20 U1.21 U1.23 U1.35 U1.48 U2.26 U2.38 U2.40 U2.42 U36.2 | length 6818
  Top Layer w7: 3018.24,4368.83 3018.24,4203.18 3045.24,4176.18 3292.97,4176.18 3393.97,4075.18 3457.97,4075.18 3468.97,4064.18 3468.97,4032 ; v2(3167.56,4277.7) 3167.56,4296.59 3136.97,4327.18 3059.97,4327.18 3018.28,4368.87 3018.28,4549.26 LED1.2@3036.29,4567.27 ; R38.2@3167.86,4277.7 3254.47,4364.32 3355.43,4364.32 ; v2(3170.47,4462.7) 3170.47,4486.69 3137.97,4519.18 3065.97,4519.18 3036.29,4548.87 LED1.2@3036.29,4567.27 ; v2(3353.97,4728.18) 3125.5,4728.18 LED.2@3035.95,4638.63 3036.29,4638.29 LED1.2@3036.29,4567.27 ; R46.2@3420.23,3983.26 3468.97,4032 ; U1.23@3477.48,4340.84 3476.83,4340.18 C71.2@3355.43,4340.18 3355.43,4364.32 ; U1.21@3477.48,4380.21 U1.20@3477.48,4399.89 3366.14,4399.89 C69.2@3355.43,4389.18 3355.43,4364.32 ; U1.35@3705.74,4289.76 3704.97,4288.99 v2(3704.97,4250.18) 3704.97,4174.92 U36.2@3791.55,4088.35 ; U1.48@3756.8,4537.72 U1.1@3725.44,4569.08 3767.97,4611.61 v2(3767.97,4692.18) ; pad.1@4009.97,3952.18 4009.97,4000.18 3953.97,4056.18 3823.71,4056.18 U36.2@3791.55,4088.35 ; pad.1@4255.97,3874.18 4289.92,3908.14 4289.92,4275.69 4320.42,4306.18 ; 4303.74,4396.64 4312.61,4387.76 U2.38@4353.17,4387.76 ; U2.42@4353.17,4309.02 4350.33,4306.18 4320.42,4306.18 ; U2.40@4353.17,4348.39 4306.49,4348.39 4303.37,4351.51 ; U2.26@4578.55,4435.98 4578.55,4462.22 C60.2@4659.97,4543.64 ; v2(4658.2,4543.64) 4658.2,4564.96 4619.28,4603.87 4336.66,4603.87 4303.37,4570.58 4303.37,4351.51 ; 3468.97,4032 3470.71,4033.74 v2(3617.97,4033.74) 3736.94,4033.74 U36.2@3791.55,4088.35 ; 4303.37,4351.51 4303.37,4323.23 4320.42,4306.18
  Bottom Layer w7: C72.2@3170.47,4273.87 3170.47,4239.69 3212.97,4197.18 R15.2@3316.93,4197.18 ; v2(3744.59,4543.23) 3751.59,4536.23 3841.02,4536.23 3853.01,4548.22 v2(3853.01,4558.18) ; v2(3767.97,4692.18) 3731.97,4728.18 v2(3353.97,4728.18) 3368.39,4742.61 3368.53,4742.61 3374.09,4748.16 3374.09,4748.3 3462.76,4836.98 3957.18,4836.98 4085.73,4708.43 R25.1@4085.73,4592.79 4085.73,4544.18 R24.1@4083.35,4541.81 R23.1@4083.35,4491.81 4083.35,4426.57 4049.74,4392.96 CODER.1@3981.78,4392.96
  other v2: 3790.97,4044.18
$1N1833: C1.2 U1.5 X1.3 | length 290.5
  Top Layer w7: X1.3@3537.51,4814.36 3615.51,4736.35 C1.2@3615.51,4691.18 3646.64,4660.06 U1.5@3646.64,4569.08
$1N1842: C2.2 U1.6 X1.1 | length 367.4
  Top Layer w7: X1.1@3450.43,4746.03 3437.51,4733.11 C2.2@3437.51,4674.18 3460.51,4697.18 3563.97,4697.18 3626.94,4634.22 U1.6@3626.94,4569.08
$1N2059: R10.2 RST.2 U1.7 | length 415.8
  Top Layer w7: RST.2@3368.44,4782.81 3408.97,4742.28 3408.97,4660.18 3415.97,4653.18 3591.97,4653.18 3607.34,4637.82 U1.7@3607.34,4569.08
  other v2: 3353.97,4763.22
$1N2202: R11.1 U1.46 | length 179.8
  Top Layer w7: U1.46@3756.8,4498.32 3781.11,4498.32 3788.97,4506.18 3788.97,4608.22 R11.1@3818.93,4638.18
$1N7742: LED.1 R31.2 | length 61.9
  Top Layer w7: LED.1@3098.95,4638.83 3147.58,4638.83 R31.2@3156.93,4648.18
$1N7809: C74.1 U2.4 | length 341.1
  Top Layer w7: U2.4@4440.76,4162.38 4440.76,4149.64 4543.21,4047.18 4669.97,4047.18 4676.53,4040.62 C74.1@4676.53,3993.18
$1N7874: C75.2 U2.5 | length 481
  Top Layer w7: U2.5@4460.44,4162.38 4460.44,4149.65 4546.96,4063.12 4689.03,4063.12 4703.97,4048.18 4703.97,3970.18 4690.97,3957.18 4658.41,3957.18 C75.2@4620.41,3919.18
$1N7928: C59.1 U2.36 | length 67.5
  Top Layer w7: C59.1@4349.51,4490.18 4349.51,4468.17 U2.36@4381.7,4435.98
$1N8829: R33.1 R34.2 R35.1 | length 96
  Top Layer w7: R34.2@4474.11,4741.12 4474.49,4740.74 R35.1@4474.49,4692.86 4521.69,4692.86 R33.1@4521.97,4693.14
$1N9135: R38.1 R39.2 TMP1.2 | length 144.1
  Top Layer w7: TMP1.2@3055.67,4222.65 3131.76,4222.65 R39.2@3136.65,4217.76 3136.65,4274.84 R38.1@3133.78,4277.7
$1N9138: R36.1 R37.2 TMP2.2 | length 134.9
  Top Layer w7: TMP2.2@3058.39,4409.18 3059.82,4407.76 R37.2@3137.34,4407.76 3137.34,4461.75 R36.1@3136.39,4462.7
$1N9649: C74.2 U2.3 | length 291.7
  Top Layer w7: U2.3@4421.07,4162.38 4421.07,4149.65 4537.53,4033.18 4604.97,4033.18 4621.41,4016.74 C74.2@4621.41,3993.18
$1N9730: C76.1 U2.44 | length 532.8
  Top Layer w7: v2(4324.6,3935.2) 4300.94,3958.86 4300.94,4230.17 4340.42,4269.65 U2.44@4353.17,4269.65
  Bottom Layer w7: v2(4324.6,3935.2) 4324.99,3935.2 4343.6,3953.81 4343.6,3970.23 4407.55,4034.18 v2(4433.41,4034.18)
$1N21393: CON.2 R47.2 | length 529.6
  Top Layer w7: CON.2@3796.9,4770.82 3839.52,4728.2 3841.53,4728.2 3929.96,4639.78 3929.96,4385.13 R47.2@3868.01,4323.18